# EAGLE board InkTime_PCB_v2 (EAGLE 9.7.0)
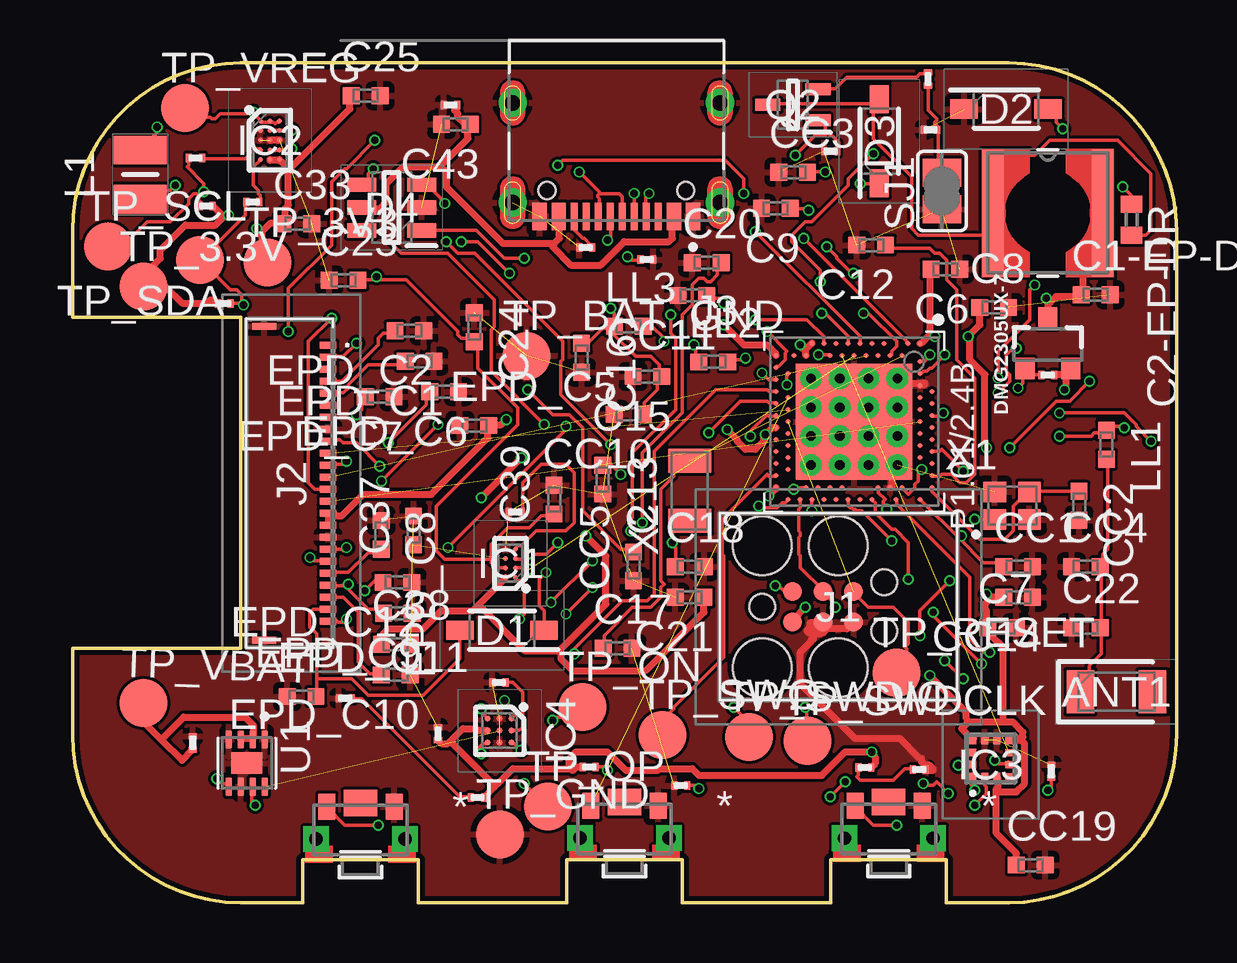
[diagram p0: board, top side]
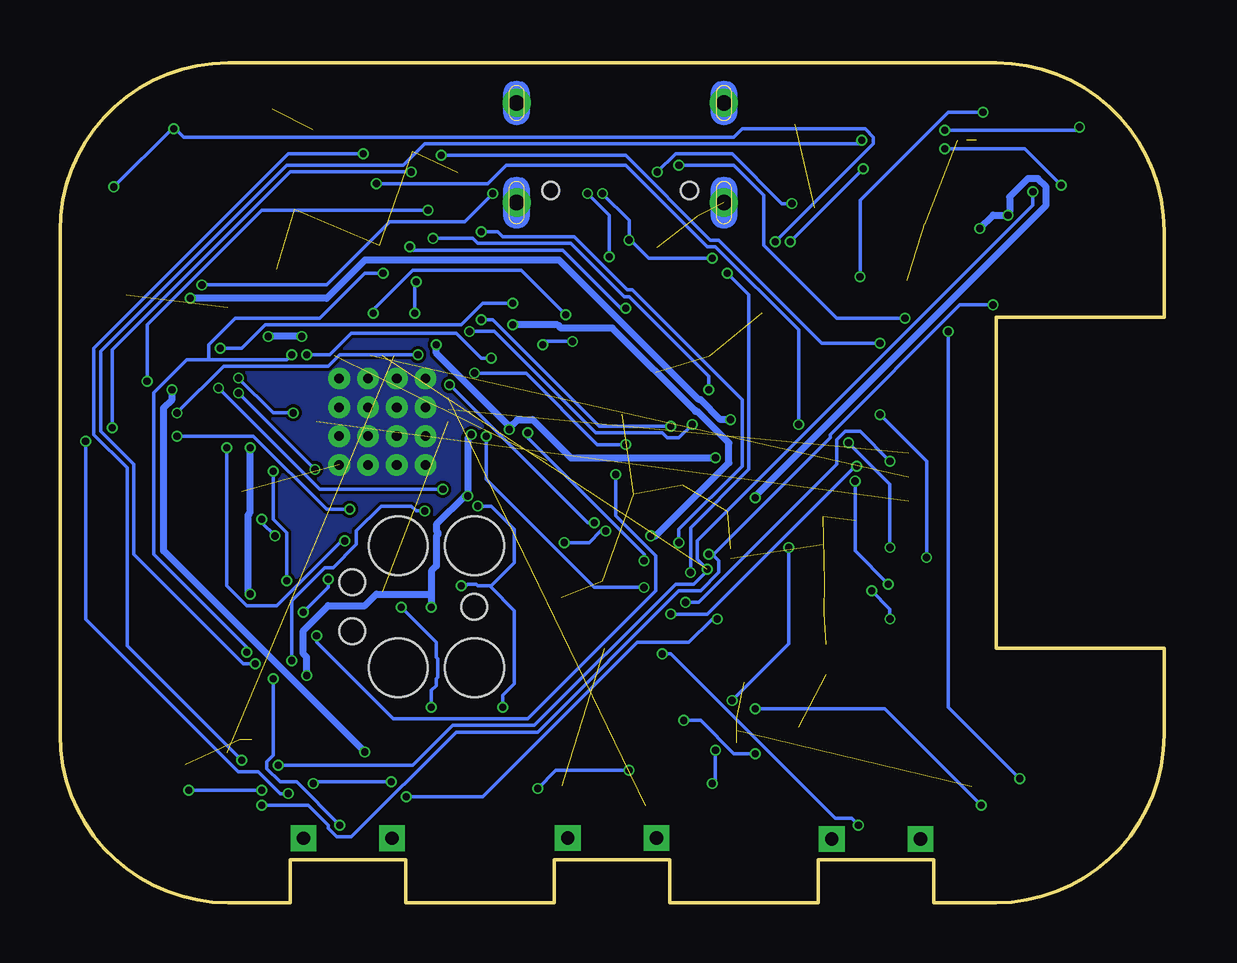
[diagram p1: board, bottom side, seen from below]

Size 46 x 35 mm. Coordinates in mm from the lower left corner, seen from the top.
Outline: 39,0 36.4,0 36.4,1.8 31.6,1.8 31.6,0 25.4,0 25.4,1.8 20.6,1.8 20.6,0 14.4,0 14.4,1.8 9.6,1.8 9.6,0 7,0 arc-90 0,7 0,10.6 7,10.6 7,24.4 0,24.4 0,28 arc-90 7,35 39,35 arc-90 46,28 46,7 arc-90 39,0
Copper layers (1*16): Top 0.035mm / dielectric 1.6mm / Bottom 0.035mm
Design rules "jlcpcb-2layerss.edru": minimum track width 0.15mm, minimum drill 0.3mm, track to track 5mil, track to pad 5mil, pad to pad 5mil, via to via 5mil, smd to smd 5mil, copper to edge 0.2mm, drill to drill 6mil, minimum pad ring 10mil, minimum via ring 3mil, stop-mask expansion 4mil, vias tented up to drill 0mil, thermal gap 10mil
Net classes: 0 default: width 0.15 mm; 1 Power: width 0.3 mm

## Footprints (pad centres in the part's own frame; a part is rotated, then mirrored left to right if it is on the bottom)
2450AT18B100E_ANTC3216X140N = smd 1.15 x 1.8: 1 -1.5,0; 2 1.5,0
NORDIC_NRF_3_RESC0402_M = smd 0.7 x 0.7: 1 -0.6,0; 2 0.6,0
GRM011R60J152KE01L_1_0201 = smd 0.35 x 0.25: 1 0,0.275; 2 0,-0.275
ESP32_C6_LIBRARY_1_ESP32_WROVER_EAGLE-LTSPICE_C0402 = smd 0.7 x 0.9: 1 -0.65,0; 2 0.65,0
ESP32_C6_LIBRARY_5_SOD3716X135N = smd 1.15 x 0.8: 1 -1.75,0; 2 1.75,0
ESP32_C6_LIBRARY_3_SOT95P280X145-6N = smd 1.2 x 0.6: 1 -1.25,0.95; 2 -1.25,0; 3 -1.25,-0.95; 4 1.25,-0.95; 5 1.25,0; 6 1.25,0.95
ESP32_C6_LIBRARY_4_ESP32_C6_LIBRARY_4_ESP32_C6_LIBRARY_4_ESP32_C6_LIBRARY_4_ESP32_WROVER_SPARKFUN-DISCRETESEMI_SOT23-3 = smd 0.8 x 0.9: 1 -0.95,-1; 2 0.95,-1; 3 0,1.1
BQ25180YBGR_BGA8C40P2X4_100X155X50 = smd 0.2 x 0.2: A1 -0.2,0.6; A2 0.2,0.6; B1 -0.2,0.2; B2 0.2,0.2; C1 -0.2,-0.2; C2 0.2,-0.2; D1 -0.2,-0.6; D2 0.2,-0.6
RT6160AWSC_BGA15C40P3X5_140X230X60 = smd 0.216 x 0.216: A1 -0.4,0.8; A2 0,0.8; A3 0.4,0.8; B1 -0.4,0.4; B2 0,0.4; B3 0.4,0.4; C1 -0.4,0; C2 0,0; C3 0.4,0; D1 -0.4,-0.4; D2 0,-0.4; D3 0.4,-0.4; E1 -0.4,-0.8; E2 0,-0.8; E3 0.4,-0.8
BMA423_BMA423 = smd 0.3 x 0.35: 1 -0.75,-0.775; 2 -0.25,-0.775; 3 0.25,-0.775; 4 0.75,-0.775; 7 0.75,0.775; 8 0.25,0.775; 9 -0.25,0.775; 10 -0.75,0.775 | smd 0.35 x 0.3: 5 0.775,-0.25; 6 0.775,0.25; 11 -0.775,0.25; 12 -0.775,-0.25
DRV2605YZFR_BGA9C50P3X3_144X144X62 = smd 0.25 x 0.25: A1 -0.5,0.5; A2 0,0.5; A3 0.5,0.5; B1 -0.5,0; B2 0,0; B3 0.5,0; C1 -0.5,-0.5; C2 0,-0.5; C3 0.5,-0.5
TC2030-IDC_TC2030IDC = smd 0.783 x 0.783: 1 -0.953,-0.635; 2 -0.953,0.635; 3 0.317,-0.635; 4 0.317,0.635; 5 1.588,-0.635; 6 1.588,0.635 | hole 2.451: -2.223,-2.54; -2.223,2.54; 0.952,-2.54; 0.952,2.54 | hole 1.067: -2.223,0; 2.857,-1.016; 2.857,1.016
503480-2400_5034802400 = smd 0.3 x 0.7: 1 -5.75,1.525; 2 -5.25,1.525; 3 -4.75,1.525; 4 -4.25,1.525; 5 -3.75,1.525; 6 -3.25,1.525; 7 -2.75,1.525; 8 -2.25,1.525; 9 -1.75,1.525; 10 -1.25,1.525; 11 -0.75,1.525; 12 -0.25,1.525; 13 0.25,1.525; 14 0.75,1.525; 15 1.25,1.525; 16 1.75,1.525; 17 2.25,1.525; 18 2.75,1.525; 19 3.25,1.525; 20 3.75,1.525; 21 4.25,1.525; 22 4.75,1.525; 23 5.25,1.525; 24 5.75,1.525 | smd 0.3 x 1: MP1 -6.54,-1.125; MP2 6.54,-1.125
KH-TYPE-C-16P_KINGHELM_KH-TYPE-C-16P = smd 0.6 x 1.15: A1_B12 -3.2,4.725; A4_B9 -2.4,4.725; A9_B4 2.4,4.725; A12_B1 3.2,4.725 | smd 0.3 x 1.15: A5 -1.25,4.725; A6 -0.25,4.725; A7 0.25,4.725; A8 1.25,4.725; B5 1.75,4.725; B6 0.75,4.725; B7 -0.75,4.725; B8 -1.75,4.725 | drill 0.65 pad 1.05: SH1 -4.32,0; SH2 4.32,0; SH3 -4.32,4.15; SH4 4.32,4.15 | hole 0.7: -2.89,3.65; 2.89,3.65
MLP2016SR47MT0S1_INDC2016X100N = smd 1.2 x 2.2: 1 -1.028,0; 2 1.028,0
ESP32_C6_LIBRARY_2_IND_4828-WE-TPC_WRE = smd 0.9 x 5.3: 1 -2.286,0; 2 2.286,0
NORDIC_NRF_2_RESC0402_M = smd 0.7 x 0.7: 1 -0.6,0; 2 0.6,0
NORDIC_NRF_4_AQFN50P700X700X85_HS-74N = smd 4.85 x 4.85: P$74 0,0 | drill 0.4 pad 0.6: P$75 -1.8,1.8; P$76 -0.6,1.8; P$77 0.6,1.8; P$78 1.8,1.8; P$79 -1.8,0.6; P$80 -0.6,0.6; P$81 0.6,0.6; P$82 1.8,0.6; P$83 -1.8,-0.6; P$84 -0.6,-0.6; P$85 0.6,-0.6; P$86 1.8,-0.6; P$87 -1.8,-1.8; P$88 -0.6,-1.8; P$89 0.6,-1.8; P$90 1.8,-1.8 | smd 0.2 x 0.2: P$A8 -1.25,3.25; P$A10 -0.75,3.25; P$A12 -0.25,3.25; P$A14 0.25,3.25; P$A16 0.75,3.25; P$A18 1.25,3.25; P$A20 1.75,3.25; P$A22 2.25,3.25; P$A23 2.75,3.25; P$AA24 3.25,-2.25; P$AB2 -2.75,-2.5; P$AC5 -2,-2.75; P$AC9 -1,-2.75; P$AC11 -0.5,-2.75; P$AC13 0,-2.75; P$AC15 0.5,-2.75; P$AC17 1,-2.75; P$AC19 1.5,-2.75; P$AC21 2,-2.75; P$AC24 3.25,-2.75; P$AD2 -2.75,-3.25; P$AD4 -2.25,-3.25; P$AD6 -1.75,-3.25; P$AD8 -1.25,-3.25; P$AD10 -0.75,-3.25; P$AD12 -0.25,-3.25; P$AD14 0.25,-3.25; P$AD16 0.75,-3.25; P$AD18 1.25,-3.25; P$AD20 1.75,-3.25; P$AD22 2.25,-3.25; P$AD23 2.75,-3.25; P$B1 -3.25,2.75; P$B3 -2.5,2.75; P$B5 -2,2.75; P$B7 -1.5,2.75; P$B9 -1,2.75; P$B11 -0.5,2.75; P$B13 0,2.75; P$B15 0.5,2.75; P$B17 1,2.75; P$B19 1.5,2.75; P$B24 3.25,2.75; P$C1 -3.25,2.25; P$D2 -2.75,2; P$D23 2.75,2; P$E24 3.25,1.75; P$F2 -2.75,1.5; P$F23 2.75,1.5; P$G1 -3.25,1.25; P$H2 -2.75,1; P$H23 2.75,1; P$J1 -3.25,0.75; P$J24 3.25,0.75; P$K2 -2.75,0.5; P$L1 -3.25,0.25; P$L24 3.25,0.25; P$M2 -2.75,0; P$N1 -3.25,-0.25; P$N24 3.25,-0.25; P$P2 -2.75,-0.5; P$P23 2.75,-0.5; P$R1 -3.25,-0.75; P$R24 3.25,-0.75; P$T2 -2.75,-1; P$T23 2.75,-1; P$U1 -3.25,-1.25; P$U24 3.25,-1.25; P$V23 2.75,-1.5; P$W1 -3.25,-1.75; P$W24 3.25,-1.75; P$Y2 -2.75,-2; P$Y23 2.75,-2
ESP32_C6_LIBRARY_6_SOT65P210X110-3N = smd 1.05 x 0.5: 1 -1.05,0.65; 2 -1.05,-0.65; 3 1.05,0
CPF0201D7K68C1_0201 = smd 0.35 x 0.25: 1 0,0.275; 2 0,-0.275
ESP32_C6_LIBRARY_7_JUMPER_SJ = smd 1.168 x 1.6: 1 -0.762,0; 2 0.762,0
2025-10-22_07-23-44_LIBRARY_SW_EVP-AKE31A_PAN = smd 0.711 x 1.092: 1 -1.4,-0.972; 2 1.4,-0.972 | drill 0.559 pad 0.914 square: 3 -1.848,0.381; 4 1.848,0.381 | smd 1.397 x 1.092: 5 0,-1.124
HECTOR_WATCH_1_TP20R = smd 2 x 2: TP 0,0
ESP32_C6_LIBRARY_SON50P200X200X80-9N = smd 0.76 x 0.27: 1 -0.985,0.75; 2 -0.985,0.25; 3 -0.985,-0.25; 4 -0.985,-0.75; 5 0.985,-0.75; 6 0.985,-0.25; 7 0.985,0.25; 8 0.985,0.75 | smd 0.9 x 1.3: 9 0,0
NORDIC_NRF_BT-XTAL_2016_N = smd 0.95 x 0.85: 1 -0.725,-0.575; 2 0.725,-0.575; 3 0.725,0.575; 4 -0.725,0.575
NORDIC_NRF_1_XTAL_3215_N = smd 1 x 1.8: 1 -1.25,0; 2 1.25,0

## Placement (x,y rotation side)
ANT1  2450AT18B100E_2450AT18B100E  [2450AT18B100E_ANTC3216X140N]  43.5,8.79 0 top
C1-EP-DR  10uF  [NORDIC_NRF_3_RESC0402_M]  42.63,25.34 0 top
C2  GRM011R60J152KE01L_1_GRM011R60J152KE01L  [GRM011R60J152KE01L_1_0201]  5.01,6.66 0 top
C2-EP-DR  4.7uF/25V  [ESP32_C6_LIBRARY_1_ESP32_WROVER_EAGLE-LTSPICE_C0402]  44.13,28.46 270 top
C3  1uF  [GRM011R60J152KE01L_1_0201]  17.77,9.18 90 top
C4  0.1uF  [GRM011R60J152KE01L_1_0201]  15.23,7.04 0 top
C5  GRM011R60J152KE01L_1_GRM011R60J152KE01L  [GRM011R60J152KE01L_1_0201]  11.37,8.52 90 top
C6  4.7uF  [NORDIC_NRF_3_RESC0402_M]  36.37,26.4 180 top
C7  100nF  [NORDIC_NRF_3_RESC0402_M]  38.73,11.47 0 top
C8  100nF  [NORDIC_NRF_3_RESC0402_M]  38.4,24.81 0 top
C9  820pF  [NORDIC_NRF_3_RESC0402_M]  29.31,28.94 180 top
C10  GRM011R60J152KE01L_1_GRM011R60J152KE01L  [GRM011R60J152KE01L_1_0201]  35.28,5.55 270 top
C11  GRM011R60J152KE01L_1_GRM011R60J152KE01L  [GRM011R60J152KE01L_1_0201]  25.34,4.89 90 top
C12  100pF  [NORDIC_NRF_3_RESC0402_M]  33.28,27.41 180 top
C13  N.C  [NORDIC_NRF_3_RESC0402_M]  22.09,17.63 270 top
C15  1uF  [NORDIC_NRF_3_RESC0402_M]  23.95,21.93 180 top
C16  47nF  [NORDIC_NRF_3_RESC0402_M]  21.21,22.71 270 top
C17  12pF  [NORDIC_NRF_3_RESC0402_M]  22.71,10.61 0 top
C18  12pF  [NORDIC_NRF_3_RESC0402_M]  25.72,14.01 0 top
C20  4.7uF  [NORDIC_NRF_3_RESC0402_M]  26.43,26.68 0 top
C21  4.7uF  [NORDIC_NRF_3_RESC0402_M]  25.71,12.74 180 top
C22  N.C  [NORDIC_NRF_3_RESC0402_M]  42.23,11.47 0 top
C23  0.1uF  [NORDIC_NRF_3_RESC0402_M]  11.3,25.95 0 top
C24  10uF  [NORDIC_NRF_3_RESC0402_M]  16.74,23.98 270 top
C25  22uF  [NORDIC_NRF_3_RESC0402_M]  12.22,33.63 0 top
C33  22uF  [NORDIC_NRF_3_RESC0402_M]  9.36,28.3 0 top
C37  1uF  [NORDIC_NRF_3_RESC0402_M]  14.21,15.52 90 top
C38  1uF  [NORDIC_NRF_3_RESC0402_M]  13.48,10.78 0 top
C39  10uF  [NORDIC_NRF_3_RESC0402_M]  20.06,16.8 90 top
C42  GRM011R60J152KE01L_1_GRM011R60J152KE01L  [GRM011R60J152KE01L_1_0201]  15.75,33.25 90 top
C43  4.7uF  [NORDIC_NRF_3_RESC0402_M]  15.97,32.44 180 top
CC1  12pF  [NORDIC_NRF_3_RESC0402_M]  39.4,14.01 0 top
CC2  12pF  [NORDIC_NRF_3_RESC0402_M]  41.94,16.55 270 top
CC3  1pF  [NORDIC_NRF_3_RESC0402_M]  30.03,30.45 0 top
CC4  1pF  [NORDIC_NRF_3_RESC0402_M]  42.23,14.01 0 top
CC5  100nF  [NORDIC_NRF_3_RESC0402_M]  23.38,14.02 90 top
CC10  N.C  [NORDIC_NRF_3_RESC0402_M]  23.18,20.36 180 top
CC11  100pF  [NORDIC_NRF_3_RESC0402_M]  25.83,25.31 180 top
CC14  4.7uF  [NORDIC_NRF_3_RESC0402_M]  39.4,12.74 180 top
CC19  100nF  [NORDIC_NRF_3_RESC0402_M]  39.93,1.57 0 top
D1  ESP32_C6_LIBRARY_5_MBR0530  [ESP32_C6_LIBRARY_5_SOD3716X135N]  17.89,11.35 180 top
D2  ESP32_C6_LIBRARY_5_MBR0530  [ESP32_C6_LIBRARY_5_SOD3716X135N]  38.9,33.08 0 top
D3  ESP32_C6_LIBRARY_5_MBR0530  [ESP32_C6_LIBRARY_5_SOD3716X135N]  33.62,31.73 90 top
D4  ESP32_C6_LIBRARY_3_USBLC6-2SC6Y  [ESP32_C6_LIBRARY_3_SOT95P280X145-6N]  13.29,28.97 180 top
DMG2305UX-7  20V/4.2A/52mΩ/1.4W  [ESP32_C6_LIBRARY_4_ESP32_C6_LIBRARY_4_ESP32_C6_LIBRARY_4_ESP32_C6_LIBRARY_4_ESP32_WROVER_SPARKFUN-DISCRETESEMI_SOT23-3]  40.64,23.27 0 top
EPD_C1  1uF/50V  [NORDIC_NRF_3_RESC0402_M]  14.46,22.57 180 top
EPD_C2  1uF/50V  [NORDIC_NRF_3_RESC0402_M]  14.04,23.84 180 top
EPD_C5  0.1uF/50V  [NORDIC_NRF_3_RESC0402_M]  16.74,19.89 0 top
EPD_C6  1uF/50V  [NORDIC_NRF_3_RESC0402_M]  15.48,21.3 180 top
EPD_C7  1uF/50V  [NORDIC_NRF_3_RESC0402_M]  12.79,21.09 180 top
EPD_C8  1uF/50V  [NORDIC_NRF_3_RESC0402_M]  12.86,15.33 270 top
EPD_C9  1uF/50V  [NORDIC_NRF_3_RESC0402_M]  13.55,12.07 180 top
EPD_C10  1uF/50V  [NORDIC_NRF_3_RESC0402_M]  13.47,9.49 180 top
EPD_C11  1uF/50V  [NORDIC_NRF_3_RESC0402_M]  9.54,8.6 0 top
EPD_C12  1uF/50V  [NORDIC_NRF_3_RESC0402_M]  13.54,13.35 180 top
IC1  BQ25180YBGR_BQ25180YBGR  [BQ25180YBGR_BGA8C40P2X4_100X155X50]  18.25,14.15 180 top
IC2  RT6160AWSC_RT6160AWSC  [RT6160AWSC_BGA15C40P3X5_140X230X60]  8.22,31.78 0 top
IC3  BMA423_BMA423  [BMA423_BMA423]  38.26,6.01 359.8 top
IC4  DRV2605YZFR_DRV2605YZFR  [DRV2605YZFR_BGA9C50P3X3_144X144X62]  17.8,7.17 270 top
J1  TC2030-IDC_TC2030-IDC  [TC2030-IDC_TC2030IDC]  30.96,12.34 0 top
J2  503480-2400_503480-2400  [503480-2400_5034802400]  9.12,17.49 270 top
J3  KH-TYPE-C-16P_KH-TYPE-C-16P  [KH-TYPE-C-16P_KINGHELM_KH-TYPE-C-16P]  22.66,33.33 180 top
L1  MLP2016SR47MT0S1_FTC252012SR47MBCA  [MLP2016SR47MT0S1_INDC2016X100N]  2.82,30.34 270 top
L5  ESP32_C6_LIBRARY_2_744043680IND_4828-WE-TPC_WRE  [ESP32_C6_LIBRARY_2_IND_4828-WE-TPC_WRE]  40.64,28.75 0 top
LL1  3.9nH  [NORDIC_NRF_2_RESC0402_M]  43.08,19.09 270 top
LL2  10uH  [NORDIC_NRF_2_RESC0402_M]  26.7,22.54 0 top
LL3  15uH  [NORDIC_NRF_2_RESC0402_M]  23.18,24.02 0 top
P1.01/2.4B  NORDIC_NRF_4_NRF52840_QF  [NORDIC_NRF_4_AQFN50P700X700X85_HS-74N]  32.57,20.05 270 top
Q2  ESP32_C6_LIBRARY_6_SI1308EDL-T1-GE3  [ESP32_C6_LIBRARY_6_SOT65P210X110-3N]  30.01,33.25 180 top
R1_EP_DR  CPF0201D7K68C1_CPF0201D7K68C1  [CPF0201D7K68C1_0201]  35.65,34.32 180 top
R2  CPF0201D7K68C1_CPF0201D7K68C1  [CPF0201D7K68C1_0201]  5.12,31.04 90 top
R2_EP_DR  CPF0201D7K68C1_CPF0201D7K68C1  [CPF0201D7K68C1_0201]  31.59,31.32 90 top
R3  CPF0201D7K68C1_CPF0201D7K68C1  [CPF0201D7K68C1_0201]  7.51,29.2 90 top
R4  CPF0201D7K68C1_CPF0201D7K68C1  [CPF0201D7K68C1_0201]  5.58,29.04 90 top
R5  CPF0201D7K68C1_CPF0201D7K68C1  [CPF0201D7K68C1_0201]  6.32,24.97 270 top
R8  CPF0201D7K68C1_CPF0201D7K68C1  [CPF0201D7K68C1_0201]  40.78,5.48 180 top
R9  10K  [CPF0201D7K68C1_0201]  18.45,16.29 90 top
R11  CPF0201D7K68C1_CPF0201D7K68C1  [CPF0201D7K68C1_0201]  16.88,4.38 90 top
R12  CPF0201D7K68C1_CPF0201D7K68C1  [CPF0201D7K68C1_0201]  33.01,5.64 90 top
R13  CPF0201D7K68C1_CPF0201D7K68C1  [CPF0201D7K68C1_0201]  21.53,5.65 270 top
R14  CPF0201D7K68C1_CPF0201D7K68C1  [CPF0201D7K68C1_0201]  23.93,26.8 90 top
R15  CPF0201D7K68C1_CPF0201D7K68C1  [CPF0201D7K68C1_0201]  21.39,27.31 90 top
R_PWR_EPD  CPF0201D7K68C1_CPF0201D7K68C1  [CPF0201D7K68C1_0201]  40.64,22 90 top
R_TYPE_SEL  CPF0201D7K68C1_CPF0201D7K68C1  [CPF0201D7K68C1_0201]  35.75,32.21 90 top
SJ1  0  [ESP32_C6_LIBRARY_7_JUMPER_SJ]  36.22,29.66 90 top
SW1  2025-10-22_07-23-44_LIBRARY_EVP-AKE31ASW_EVP-AKE31A_PAN  [2025-10-22_07-23-44_LIBRARY_SW_EVP-AKE31A_PAN]  12,3.03 180 top
SW2  2025-10-22_07-23-44_LIBRARY_EVP-AKE31ASW_EVP-AKE31A_PAN  [2025-10-22_07-23-44_LIBRARY_SW_EVP-AKE31A_PAN]  23,3.08 180 top
SW3  2025-10-22_07-23-44_LIBRARY_EVP-AKE31ASW_EVP-AKE31A_PAN  [2025-10-22_07-23-44_LIBRARY_SW_EVP-AKE31A_PAN]  34.01,3.07 180 top
TP_3.3V  HECTOR_WATCH_1_TPTP20R  [HECTOR_WATCH_1_TP20R]  2.96,25.68 0 top
TP_3V3  HECTOR_WATCH_1_TPTP20R  [HECTOR_WATCH_1_TP20R]  8.12,26.68 0 top
TP_BAT_GND  HECTOR_WATCH_1_TPTP20R  [HECTOR_WATCH_1_TP20R]  18.92,22.79 0 top
TP_GND  HECTOR_WATCH_1_TPTP20R  [HECTOR_WATCH_1_TP20R]  17.8,2.85 0 top
TP_ON  HECTOR_WATCH_1_TPTP20R  [HECTOR_WATCH_1_TP20R]  21.24,8.17 0 top
TP_OP  HECTOR_WATCH_1_TPTP20R  [HECTOR_WATCH_1_TP20R]  19.81,4.01 0 top
TP_RESET  HECTOR_WATCH_1_TPTP20R  [HECTOR_WATCH_1_TP20R]  34.33,9.59 0 top
TP_SCL  HECTOR_WATCH_1_TPTP20R  [HECTOR_WATCH_1_TP20R]  1.48,27.35 0 top
TP_SDA  HECTOR_WATCH_1_TPTP20R  [HECTOR_WATCH_1_TP20R]  5.31,26.78 180 top
TP_SWDCLK  HECTOR_WATCH_1_TPTP20R  [HECTOR_WATCH_1_TP20R]  30.62,6.75 0 top
TP_SWDIO  HECTOR_WATCH_1_TPTP20R  [HECTOR_WATCH_1_TP20R]  28.19,6.92 0 top
TP_SWO  HECTOR_WATCH_1_TPTP20R  [HECTOR_WATCH_1_TP20R]  24.59,7 0 top
TP_VBAT  HECTOR_WATCH_1_TPTP20R  [HECTOR_WATCH_1_TP20R]  2.96,8.33 358.1 top
TP_VREG  HECTOR_WATCH_1_TPTP20R  [HECTOR_WATCH_1_TP20R]  4.69,33.12 0 top
U1  ESP32_C6_LIBRARY_MAX17048G+T10  [ESP32_C6_LIBRARY_SON50P200X200X80-9N]  7.26,5.82 270 top
X1  32MHz  [NORDIC_NRF_BT-XTAL_2016_N]  39.15,16.55 0 top
X2  32.768KHz  [NORDIC_NRF_1_XTAL_3215_N]  25.72,17.17 90 top

## Library data of the parts
ANT1 = InkTime_v5; ARROW_PART_NUMBER: 2450AT18B100E; ARROW_PRICE-STOCK: https://www.arrow.com/en/products/2450at18b100e/johanson-dielectrics?utm_currency=USD&region=nac; DESCRIPTION: Antennas 2.45GHz ANTENNA; HEIGHT: 1.4mm; MANUFACTURER_NAME: JOHANSON TECHNOLOGY; MANUFACTURER_PART_NUMBER: 2450AT18B100E; MOUSER_PART_NUMBER: 609-2450AT18B100E; MOUSER_PRICE-STOCK: https://www.mouser.co.uk/ProductDetail/Johanson-Technology/2450AT18B100E?qs=yCnrNFeXz%252Bh5MFsFIXGZGA%3D%3D
C1-EP-DR C2-C13 C15-C18 C20-C25 C33 C37-C39 C42 C43 CC1-CC5 CC10 CC11 CC14 CC19 EPD_C1 EPD_C2 EPD_C5-EPD_C12 LL1-LL3 P1.01/2.4B R1_EP_DR R2 R2_EP_DR R3-R5 R8 R9 R11-R15 R_PWR_EPD R_TYPE_SEL SJ1 TP_3.3V TP_3V3 TP_BAT_GND TP_GND TP_ON TP_OP TP_RESET TP_SCL TP_SDA TP_SWDCLK TP_SWDIO TP_SWO TP_VBAT TP_VREG X1 X2 = InkTime_v5
C2-EP-DR = InkTime_v5; SPICEMODEL: NONE; SPICEPREFIX: C
D1-D3 = InkTime_v5; AVAILABILITY: In Stock; CHECK_PRICES: https://www.snapeda.com/parts/MBR0530/Onsemi/view-part/?ref=eda; DESCRIPTION: Diode Schottky 30 V 500mA Surface Mount SOD-123; MF: ON Semiconductor; MP: MBR0530; PACKAGE: SOD-123-2 ON Semiconductor; PRICE: None; PURCHASE-URL: https://www.snapeda.com/api/url_track_click_mouser/?unipart_id=179458&manufacturer=ON Semiconductor&part_name=MBR0530&search_term=None; SNAPEDA_LINK: https://www.snapeda.com/parts/MBR0530/Onsemi/view-part/?ref=snap
D4 = InkTime_v5; AVAILABILITY: In Stock; CHECK_PRICES: https://www.snapeda.com/parts/USBLC6-2SC6Y/STMicroelectronics/view-part/?ref=eda; DESCRIPTION: 17V Clamp 5A (8/20µs) Ipp Tvs Diode Surface Mount SOT-23-6; MF: STMicroelectronics; MP: USBLC6-2SC6Y; PACKAGE: SOT-23-6 STMicroelectronics; PRICE: None; SNAPEDA_LINK: https://www.snapeda.com/parts/USBLC6-2SC6Y/STMicroelectronics/view-part/?ref=snap
DMG2305UX-7 = InkTime_v5; PROD_ID: TRAN-14388
IC1 = InkTime_v5; ARROW_PART_NUMBER: BQ25180YBGR; ARROW_PRICE-STOCK: https://www.arrow.com/en/products/bq25180ybgr/texas-instruments?utm_currency=USD&region=nac; DESCRIPTION: Charger IC Lithium Ion/Polymer, Lithium Iron Phosphate 8-DSBGA (1.6x1.1); HEIGHT: 0.5mm; MANUFACTURER_NAME: Texas Instruments; MANUFACTURER_PART_NUMBER: BQ25180YBGR; MOUSER_PART_NUMBER: 595-BQ25180YBGR; MOUSER_PRICE-STOCK: https://www.mouser.co.uk/ProductDetail/Texas-Instruments/BQ25180YBGR?qs=doiCPypUmgEWjAK%252BJAX6Tw%3D%3D
IC2 = InkTime_v5; DESCRIPTION: Buck-Boost Regulator Positive Output Step-Up/Step-Down I2C DC-DC Controller IC 15-WL-CSP (BSC) (1.4x2.3); HEIGHT: 0.6mm; MANUFACTURER_NAME: RICHTEK; MANUFACTURER_PART_NUMBER: RT6160AWSC; MOUSER_PART_NUMBER: 835-RT6160AWSC; MOUSER_PRICE-STOCK: https://www.mouser.co.uk/ProductDetail/Richtek/RT6160AWSC?qs=amGC7iS6iy%2FLd9PSoixZXQ%3D%3D
IC3 = InkTime_v5; ARROW_PART_NUMBER: BMA423; ARROW_PRICE-STOCK: https://www.arrow.com/en/products/bma423/bosch; DESCRIPTION: Accelerometers Triaxial low-g 12bit Acceleration Sensor; HEIGHT: 1mm; MANUFACTURER_NAME: BOSCH; MANUFACTURER_PART_NUMBER: BMA423; MOUSER_PART_NUMBER: 262-BMA423; MOUSER_PRICE-STOCK: https://www.mouser.co.uk/ProductDetail/Bosch-Sensortec/BMA423?qs=HXFqYaX1Q2xC%252BSgeGoX3mg%3D%3D
IC4 = InkTime_v5; ARROW_PART_NUMBER: DRV2605YZFR; ARROW_PRICE-STOCK: https://www.arrow.com/en/products/drv2605yzfr/texas-instruments?region=nac; DESCRIPTION: Haptic Driver for ERM/LRA with Built-In Library and Smart Loop Architecture; HEIGHT: 0.625mm; MANUFACTURER_NAME: Texas Instruments; MANUFACTURER_PART_NUMBER: DRV2605YZFR
J1 = InkTime_v5; DESCRIPTION: CABLE ADAPTER 6 POS; HEIGHT: 19mm; MANUFACTURER_NAME: Tag Connect; MANUFACTURER_PART_NUMBER: TC2030-IDC
J2 = InkTime_v5; DESCRIPTION: FFC & FPC Connectors 0.5mm FPC RA SMT Dual Contact 24Ckt; HEIGHT: 1.87mm; MANUFACTURER_NAME: Molex; MANUFACTURER_PART_NUMBER: 503480-2400; MOUSER_PART_NUMBER: 538-503480-2400; MOUSER_PRICE-STOCK: https://www.mouser.co.uk/ProductDetail/Molex/503480-2400?qs=OAhjpuo3Vu7efIoxFh9AOw%3D%3D
J3 = InkTime_v5; AVAILABILITY: Not in stock; CHECK_PRICES: https://www.snapeda.com/parts/KH-TYPE-C-16P/Kinghelm/view-part/?ref=eda; MF: kinghelm; MP: KH-TYPE-C-16P; PACKAGE: None; PRICE: None; SNAPEDA_LINK: https://www.snapeda.com/parts/KH-TYPE-C-16P/Kinghelm/view-part/?ref=snap
L1 = InkTime_v5; DESCRIPTION: SMD / SMT Inductors (Coils), L=0.47?H, L x W x T :; HEIGHT: 1mm; JLCPCB: https://jlcpcb.com/partdetail/6763488-FTC252012SR47MBCA/C5832368; MANUFACTURER_NAME: TDK; MANUFACTURER_PART_NUMBER: FTC252012SR47MBCA
L5 = InkTime_v5; COPYRIGHT: Copyright (C) 2024 Ultra Librarian. All rights reserved.; MANUFACTURER_PART_NUMBER: 744043680; MFR_NAME: Wurth Electronics
Q2 = InkTime_v5; AVAILABILITY: In Stock; CHECK_PRICES: https://www.snapeda.com/parts/SI1308EDL-T1-GE3/Vishay+Siliconix/view-part/?ref=eda; DESCRIPTION: Si1308EDL-T1-GE3 N-channel MOSFET Transistor, 1.5 A, 30 V, 3-Pin SC-70 | Siliconix / Vishay SI1308EDL-T1-GE3; MF: Vishay Siliconix; MP: SI1308EDL-T1-GE3; PACKAGE: SOT-323 Vishay Semiconductor; PRICE: None; PURCHASE-URL: https://www.snapeda.com/api/url_track_click_mouser/?unipart_id=274603&manufacturer=Vishay Siliconix&part_name=SI1308EDL-T1-GE3&search_term=None; SNAPEDA_LINK: https://www.snapeda.com/parts/SI1308EDL-T1-GE3/Vishay+Siliconix/view-part/?ref=snap
SW1-SW3 = InkTime_v5; COPYRIGHT: Copyright (C) 2025 Ultra Librarian. All rights reserved.; DIGI-KEY_PART_NUMBER_1: P123437TR-ND; DIGI-KEY_PART_NUMBER_2: P123437CT-ND; DIGI-KEY_PART_NUMBER_3: P123437DKR-ND; MANUFACTURER_NAME: Panasonic; MANUFACTURER_PART_NUMBER: EVP-AKE31A
U1 = InkTime_v5; AVAILABILITY: In Stock; CHECK_PRICES: https://www.snapeda.com/parts/MAX17048G+T10/Analog+Devices/view-part/?ref=eda; DESCRIPTION: 3µA 1-Cell/2-Cell Fuel Gauge with ModelGauge; MF: Analog Devices; MP: MAX17048G+T10; PACKAGE: TDFN-8 Maxim; PRICE: None; PURCHASE-URL: https://www.snapeda.com/api/url_track_click_mouser/?unipart_id=329239&manufacturer=Analog Devices&part_name=MAX17048G+T10&search_term=None; SNAPEDA_LINK: https://www.snapeda.com/parts/MAX17048G+T10/Analog+Devices/view-part/?ref=snap

## Nets
3V3/1.7D: C4.2 DMG2305UX-7.2 IC4.C2 R11.2 R12.2 R13.2 R_PWR_EPD.2
3V3/2.4A: C6.2 C7.1 C8.1 C25.1 C33.1 CC14.2 CC19.1 IC2.E2 IC2.E3 IC3.3 IC3.7 IC3.10 J1.1 P1.01/2.4B.P$AD14 P1.01/2.4B.P$AD23 P1.01/2.4B.P$B1 P1.01/2.4B.P$W1 P1.01/2.4B.P$Y2 R4.2 R5.2 TP_3.3V.TP TP_3V3.TP
ALERT: P1.01/2.4B.P$J24 U1.5
D+: D4.4 P1.01/2.4B.P$AD6
D-: D4.6 P1.01/2.4B.P$AD4
DN: D4.1 J3.A7 J3.B7
DP: D4.3 J3.A6 J3.B6
EPD_3V3: C1-EP-DR.1 DMG2305UX-7.3 EPD_C5.2 J2.15 J2.16 L5.2
EPD_BUSY: J2.9 P1.01/2.4B.P$AD12
EPD_CS: J2.12 P1.01/2.4B.P$K2
EPD_DC: J2.11 P1.01/2.4B.P$AD10
EPD_RST: J2.10 P1.01/2.4B.P$AC11
GDR: J2.2 Q2.1 R2_EP_DR.2
GND: C1-EP-DR.2 C2.1 C3.1 C4.1 C5.1 C6.1 C7.2 C8.2 C9.2 C10.1 C11.1 C12.2 C13.2 C15.2 C16.2 C17.2 C18.2 C20.1 C21.2 C22.1 C23.1 C24.1 C25.2 C33.2 C37.2 C38.2 C39.2 C42.1 C43.2 CC1.2 CC2.2 CC3.1 CC4.1 CC5.1 CC10.2 CC11.2 CC14.1 CC19.2 D2.1 D4.2 EPD_C1.1 EPD_C2.1 EPD_C5.1 EPD_C6.1 EPD_C7.1 EPD_C8.1 EPD_C9.1 EPD_C10.1 EPD_C11.1 EPD_C12.1 IC1.D2 IC2.B1 IC2.C1 IC2.C2 IC2.C3 IC3.8 IC3.9 IC4.B1 IC4.B3 J1.3 J1.5 J2.8 J2.17 J2.MP1 J2.MP2 J3.A1_B12 J3.A12_B1 J3.SH1 J3.SH2 J3.SH3 J3.SH4 P1.01/2.4B.P$74 P1.01/2.4B.P$75 P1.01/2.4B.P$76 P1.01/2.4B.P$77 P1.01/2.4B.P$78 P1.01/2.4B.P$79 P1.01/2.4B.P$80 P1.01/2.4B.P$81 P1.01/2.4B.P$82 P1.01/2.4B.P$83 P1.01/2.4B.P$84 P1.01/2.4B.P$85 P1.01/2.4B.P$86 P1.01/2.4B.P$87 P1.01/2.4B.P$88 P1.01/2.4B.P$89 P1.01/2.4B.P$90 P1.01/2.4B.P$B7 P1.01/2.4B.P$F23 R2_EP_DR.1 R8.2 R9.1 R14.2 R15.1 R_TYPE_SEL.1 SJ1.1 SW1.1 SW2.1 SW3.1 TP_BAT_GND.TP TP_GND.TP U1.1 U1.4 U1.6 U1.9 X1.2 X1.4
HAPTIC_EN: IC4.A1 P1.01/2.4B.P$U1
IMU_INT1: IC3.5 P1.01/2.4B.P$N1
IMU_INT2: IC3.6 P1.01/2.4B.P$P2
LX1: IC2.B2 IC2.B3 L1.1
LX2: IC2.D2 IC2.D3 L1.2
MOSI: J2.14 P1.01/2.4B.P$B13
N$1: IC1.D1 R9.2
N$2: C9.1 P1.01/2.4B.P$N24
N$3: CC3.2 LL1.1 P1.01/2.4B.P$H23
N$4: IC2.D1 R2.2
N$5: IC2.E1 R3.2
N$6: C20.2 P1.01/2.4B.P$AC5
N$7: ANT1.1 C22.2 CC4.2 LL1.2
N$8: CC1.1 P1.01/2.4B.P$B24 X1.1
N$9: CC2.1 P1.01/2.4B.P$A23 X1.3
N$10: CC11.1 P1.01/2.4B.P$D23
N$11: C18.1 P1.01/2.4B.P$F2 X2.1
N$12: C12.1 P1.01/2.4B.P$A22
N$13: C13.1 P1.01/2.4B.P$A18
N$14: LL2.1 LL3.2
N$15: LL2.2 P1.01/2.4B.P$B3
N$17: C15.1 C16.1 CC10.1 LL3.1 P1.01/2.4B.P$B5 P1.01/2.4B.P$E24
N$18: C17.1 P1.01/2.4B.P$D2 X2.2
N$19: IC3.1 R8.1
N$20: CC5.2 P1.01/2.4B.P$C1
N$21: C2-EP-DR.1 D1.1 D2.2
N$22: Q2.2 R1_EP_DR.2
N$23: R1_EP_DR.1 R_TYPE_SEL.2 SJ1.2
N$24: C2-EP-DR.2 D3.2 L5.1 Q2.3
N$25: EPD_C2.2 J2.4
N$26: EPD_C1.2 J2.5
N$27: J3.B5 R15.2
N$28: EPD_C7.2 J2.19
N$29: C5.2 R11.1
N$30: EPD_C12.2 J2.24
N$31: EPD_C6.2 J2.18
N$32: EPD_C8.2 J2.20
N$33: C10.2 R12.1
N$34: EPD_C10.2 J2.22
N$35: C11.2 R13.1
N$36: J3.A5 R14.1
N$37: C3.2 IC4.A2
OUT+: IC4.A3 TP_OP.TP
OUT-: IC4.C3 TP_ON.TP
P0.04: P1.01/2.4B.P$J1
P0.09: P1.01/2.4B.P$L24
P0.13: P1.01/2.4B.P$AD8 SW1.2
P0.14: P1.01/2.4B.P$AC9 SW2.2
P0.19: P1.01/2.4B.P$AC15
P0.20: P1.01/2.4B.P$AD16
P0.21: P1.01/2.4B.P$AC17
P0.22: P1.01/2.4B.P$AD18
P0.23: P1.01/2.4B.P$AC19
P0.24: P1.01/2.4B.P$AD20
P0.25: P1.01/2.4B.P$AC21
P0.26: P1.01/2.4B.P$G1
P0.27: P1.01/2.4B.P$H2
P0.28: P1.01/2.4B.P$B11
P0.29: P1.01/2.4B.P$A10
P0.30: P1.01/2.4B.P$B9
P0.31: P1.01/2.4B.P$A8
P1.01: DMG2305UX-7.1 P1.01/2.4B.P$Y23 R_PWR_EPD.1
P1.02: P1.01/2.4B.P$W24 SW3.2
P1.03: P1.01/2.4B.P$V23
P1.04: P1.01/2.4B.P$U24
P1.05: P1.01/2.4B.P$T23
P1.06: P1.01/2.4B.P$R24
P1.07: P1.01/2.4B.P$P23
P1.09: P1.01/2.4B.P$R1
P1.10: P1.01/2.4B.P$A20
P1.11: P1.01/2.4B.P$B19
P1.12: P1.01/2.4B.P$B17
P1.13: P1.01/2.4B.P$A16
P1.14: P1.01/2.4B.P$B15
P1.15: P1.01/2.4B.P$A14
PMIC_INT: IC1.A1 P1.01/2.4B.P$T2
PREVGH: D3.1 EPD_C9.2 J2.21
PREVGL: D1.2 EPD_C11.2 J2.23
RESE: J2.3
RESET: J1.6 P1.01/2.4B.P$AC13 TP_RESET.TP
SCK: J2.13 P1.01/2.4B.P$A12
SCL/1.4C: IC4.C1 U1.7
SCL/2.4C: IC1.B1 IC3.12 P1.01/2.4B.P$M2 R2.1 R4.1 TP_SCL.TP
SDA/1.4C: IC4.B2 U1.8
SDA/2.4C: IC1.C1 IC3.2 P1.01/2.4B.P$L1 R3.1 R5.1 TP_SDA.TP
SWDCLK: J1.4 P1.01/2.4B.P$AA24 TP_SWDCLK.TP
SWDIO: J1.2 P1.01/2.4B.P$AC24 TP_SWDIO.TP
SWO: P1.01/2.4B.P$AD22 TP_SWO.TP
VBAT/1.2A: C2.2 TP_VBAT.TP U1.2 U1.3
VBAT/2.5C: C37.1 IC1.C2
VBUS/1.5D: C42.2 C43.1 D4.5 J3.A4_B9 J3.A9_B4
VBUS/2.6D: C21.1 C38.1 IC1.A2 P1.01/2.4B.P$AD2
VREG: C23.2 C24.2 C39.1 IC1.B2 IC2.A1 IC2.A2 IC2.A3 TP_VREG.TP

## Tracks (layer width: path | path; a pad name or v marks a point on that pad's centre or on a via)
3V3/1.7D  (via drill 0.3)
  Top 0.3: R_PWR_EPD.2 41.33,22 41.54,22.21 DMG2305UX-7.2 41.4,21.87 41.4,21.45 v41.33,21.38 | 15.75,6.74 15.64,6.63 15.36,6.63 15.3,6.7 C4.2 | 15.75,6.74 16.26,7.25 16.82,7.25 16.89,7.19 17.23,7.19 IC4.C2 | 17.58,4.9 17.58,4.83 17.16,4.42 R11.2 | 15.75,6.74 17.58,4.9 | 20.77,5.59 20.84,5.52 20.97,5.66 R13.2 | 20.77,5.59 18.34,5.59 17.72,4.97 17.58,4.9 | 33.27,6.25 33.23,6.29 32.19,6.29 31.22,5.32 26.1,5.32 25.82,5.59 24.44,5.59 24.37,5.52 23.05,5.52 22.29,6.29 20.97,6.29 20.7,6.01 20.7,5.73 20.77,5.59 | 33.27,6.25 33.44,6.08 33.44,5.8 33.3,5.66 R12.2 | v33.3,6.29 33.27,6.25
  Bottom 0.3: v41.33,21.38 41.33,20.97 41.68,20.62 41.68,14.66 v33.3,6.29
3V3/2.4A  (via drill 0.3)
  Top 0.3: R5.2 6.02,24.98 5.88,25.12 5.74,25.12 5.6,24.98 4.56,24.98 3.87,25.68 2.97,25.68 TP_3.3V.TP 3.31,25.81 3.31,26.51 3.66,26.85 3.66,27.2 4.7,28.24 5.95,28.24 6.29,28.58 | 6.29,28.58 5.88,29 R4.2 | 8.58,30.94 8.23,30.94 IC2.E2 | 8.58,30.94 IC2.E3 | 8.99,30.59 8.72,30.87 8.58,30.94 | 8.99,30.59 8.99,29.07 8.85,28.93 8.85,28.38 8.79,28.31 C33.1 8.65,28.31 8.23,28.31 7.89,27.96 | C25.1 11.56,33.57 11.56,33.08 9.13,30.66 8.99,30.59 | 7.89,27.96 7.89,27.68 8.09,27.48 8.09,26.71 TP_3V3.TP | v6.5,28.65 6.43,28.65 6.29,28.58 | v7.68,28.1 7.75,28.03 7.89,27.96 | 30.53,23.04 30.53,22.84 P1.01/2.4B.P$Y2 | 30.53,23.04 30.81,23.32 P1.01/2.4B.P$W1 | v29.01,16.95 29.28,17.23 P1.01/2.4B.P$AD23 | P1.01/2.4B.P$AD14 29.28,19.79 29.15,19.79 v28.87,19.51 28.8,19.37 28.8,19.24 28.45,18.89 28.04,18.89 27.69,19.24 27.69,19.3 v27.28,19.72 | v30.32,23.25 30.39,23.18 30.39,23.11 30.53,23.04 | v30.53,12.31 30.05,11.83 30.05,11.76 J1.1 | 35.72,23.67 35.38,23.32 P1.01/2.4B.P$B1 | 35.72,23.67 35.72,26.37 C6.2 | v35.93,23.6 35.86,23.6 35.72,23.67 | C8.1 37.8,24.77 37.8,24.08 v37.32,23.6 37.39,23.46 37.39,22.63 38.01,22 38.01,19.03 v38.08,18.96 | 38.25,12.69 38.29,12.73 38.77,12.73 CC14.2 | 38.25,12.69 38.01,12.45 38.01,12.24 38.08,12.17 38.08,11.48 C7.1 38.15,11.34 38.29,11.2 38.29,11.13 38.77,10.65 38.77,7.53 | 38.49,4.62 38.49,2.89 39.32,2.06 CC19.1 | 38.49,4.62 38.49,4.76 38.56,4.83 38.56,5.18 IC3.3 | 39.53,6.77 39.46,6.77 39.39,6.84 39.19,6.84 39.12,6.77 39.05,6.77 IC3.7 | 39.53,6.77 39.67,6.63 39.67,4.97 39.32,4.62 38.49,4.62 | 37.32,7.53 37.04,7.25 37.45,6.84 IC3.10 | 38.77,7.53 39.19,7.53 39.6,7.12 39.6,6.91 39.53,6.77
  Top 0.3: 38.77,7.53 37.32,7.53 | v38.08,12.86 38.25,12.69 | v35.72,9.47 37.25,7.95 37.25,7.67 37.32,7.53 | v18.69,18.54 v17.03,16.88
  Bottom 0.3: v7.68,28.1 7.12,28.65 v6.5,28.65 6.43,28.79 6.43,29.41 5.67,30.18 5.25,30.18 4.91,29.83 4.91,29.07 17.03,16.95 v17.03,16.88 | v28.87,19.51 29.01,19.37 v29.01,16.95 29.15,16.95 30.32,15.77 30.32,15.5 30.25,15.43 30.25,15.36 30.32,15.29 30.32,14.04 30.53,13.83 30.53,12.86 | v30.32,23.25 30.32,22.91 27.28,19.86 | v27.28,19.72 27.28,19.86 | 30.53,12.86 v30.53,12.31 | v35.93,23.6 v37.32,23.6 | v38.08,18.96 38.08,16.26 38.15,16.19 38.15,12.93 v38.08,12.86 | 30.53,12.86 32.82,12.86 33.3,12.38 34.82,12.38 35.86,11.34 35.86,10.37 35.72,10.23 v35.72,9.47 | v18.69,18.54 24.71,18.54 26.31,20.14 26.93,20.14 27.14,19.93 27.28,19.86
ALERT  (via drill 0.3)
  Top 0.15: v34.82,13.49 34.82,15.01 34.27,15.56 34.13,15.56 33.44,16.26 33.44,16.67 33.37,16.74 P1.01/2.4B.P$J24 | v35.86,12.1 35.86,11.96 v37.87,9.96 | v12.59,31.77 11.42,30.59 11.35,30.59 10.79,30.04 10.79,27.41 8.99,25.61 v8.99,23.81 | v6.02,5.18 6.22,4.97 6.5,4.97 6.57,4.9 U1.5
  Bottom 0.15: v34.82,13.49 34.82,13.14 v35.86,12.1 | v37.87,9.96 38.36,9.96 42.93,14.53 42.93,18.27 44.31,19.65 44.31,22.97 36.55,30.73 31.71,30.73 30.81,31.63 12.73,31.63 v12.59,31.77 | v8.99,23.81 8.99,8.16 v6.02,5.18
D+  (via drill 0.3)
  Top 0.15: v28.73,22.07 29.01,21.8 29.28,21.8 P1.01/2.4B.P$AD6 | v22.43,19.1 20.35,21.17 20.35,22.56 20.42,22.63 20.42,23.39 16.75,27.06 16.06,27.06 v15.57,27.55 | v12.52,30.59 12.32,30.38 12.32,30.18 12.11,29.97 D4.4
  Bottom 0.15: v28.73,22.07 26.58,22.07 23.6,19.1 v22.43,19.1 | v12.52,30.59 v15.57,27.55
D-  (via drill 0.3)
  Top 0.15: v28.94,23.81 29.77,22.97 29.7,22.91 29.7,22.63 29.42,22.35 29.35,22.35 P1.01/2.4B.P$AD4 | v19.66,19.93 17.44,22.14 17.44,23.87 17.58,24.01 17.58,25.12 15.64,27.06 13.7,27.06 12.8,27.96 12.11,27.96 D4.6
  Bottom 0.15: v28.94,23.81 27.9,23.81 23.67,19.58 20.9,19.58 20.7,19.37 20.21,19.37 v19.66,19.93
DN  (via drill 0.3)
  Top 0.15: v22.29,27.61 22.43,27.75 22.43,28.58 J3.A7 | v23.4,29.55 23.4,28.65 J3.B7 | v18.83,26.85 18,26.85 16.82,28.03 14.6,28.03 D4.1
  Bottom 0.15: v23.4,29.55 22.29,28.45 v22.29,27.61 22.22,27.61 21.46,26.85 v18.83,26.85
DP  (via drill 0.3)
  Top 0.15: 21.94,29.55 21.87,29.48 21.87,29.41 21.94,29.35 21.94,28.65 J3.B6 | 21.94,29.55 22.77,29.55 22.91,29.41 22.91,28.65 J3.A6 | v15.5,29.14 15.36,29.28 15.36,29.35 14.81,29.9 14.6,29.9 D4.3 | v21.11,30.45 21.94,29.62 21.94,29.55
  Bottom 0.15: v15.5,29.14 15.92,29.14 18,31.22 20.35,31.22 v21.11,30.45
EPD_3V3  (via drill 0.3)
  Top 0.3: L5.2 42.86,28.72 42.86,28.24 42.09,27.48 42.09,25.4 C1-EP-DR.1 41.96,25.26 40.99,25.26 40.74,25.02 | 40.74,25.02 40.64,24.91 40.64,24.43 DMG2305UX-7.3 | J2.16 10.66,15.77 10.66,16.19 J2.15 10.79,16.19 10.93,16.19 11,16.12 11.21,16.12 12.11,17.02 14.95,17.02 17.3,19.37 17.3,19.86 EPD_C5.2 17.44,19.93 17.86,19.93 v18.07,20.14 | v40.57,25.19 40.74,25.02
  Bottom 0.3: v40.57,25.19 34.89,25.19 33.3,26.78 25.2,26.78 19.38,20.97 19.31,20.97 18.48,20.14 v18.07,20.14
EPD_BUSY  (via drill 0.3)
  Top 0.15: v28.24,19.44 28.24,19.65 28.94,20.34 29.01,20.27 29.28,20.27 P1.01/2.4B.P$AD12 | v20.56,12.03 v21.67,13.14 | v12.8,18.2 11.83,19.17 11.28,19.17 11.14,19.3 11,19.3 10.93,19.24 J2.9
  Bottom 0.15: v28.24,19.44 28.24,17.64 23.74,13.14 v21.67,13.14 | v20.56,12.03 19.03,12.03 12.87,18.2 v12.8,18.2
EPD_CS  (1 unrouted)
EPD_DC  (via drill 0.3)
  Top 0.15: v26.51,19.58 27.83,20.9 28.94,20.9 29.01,20.83 29.28,20.83 P1.01/2.4B.P$AD10 | v19.93,12.52 v21.67,14.25 | v11.42,18.4 11.28,18.27 10.66,18.27 J2.11
  Bottom 0.15: v26.51,19.58 26.51,19.37 21.67,14.53 v21.67,14.25 | v19.93,12.52 19.38,12.52 13.63,18.27 13.63,19.3 13.29,19.65 12.66,19.65 v11.42,18.4
EPD_RST  (1 unrouted)
GDR  (via drill 0.3)
  Top 0.15: 31.46,32.08 31.36,32.18 31.36,32.39 31.22,32.53 31.08,32.53 Q2.1 | 31.46,32.08 31.57,31.98 31.64,31.98 31.92,31.7 31.92,31.56 31.85,31.49 31.85,31.35 R2_EP_DR.2 | v11.83,23.32 11.28,22.77 10.66,22.77 J2.2 | v30.11,31.15 30.95,31.98 31.36,31.98 31.46,32.08
  Bottom 0.15: v11.83,23.32 14.26,23.32 18.55,27.61 18.9,27.61 22.43,31.15 v30.11,31.15
GND  (31 unrouted)
  Top 0.3: 30.81,10.99 30.88,10.99 30.88,11.13 30.95,11.2 31.15,11.2 31.15,11.27 30.88,11.55 30.81,11.55 30.81,11.41 30.67,11.27 30.6,11.34 30.74,11.48 30.74,11.69 31.22,11.69 J1.3 | 30.81,10.99 30.81,11.13 31.08,11.41 31.15,11.41 31.29,11.27 31.43,11.41 32.26,11.41 J1.5 | IC2.C2 8.58,31.77 IC2.C3 | P1.01/2.4B.P$F23 34.13,17.3 34.13,17.99 34.34,18.2 P1.01/2.4B.P$74 | P1.01/2.4B.P$B7 35.38,21.59 35.45,21.66 35.52,21.66 35.52,21.59 35.45,21.59 35.38,21.66 34.55,21.66 34.41,21.8 P1.01/2.4B.P$74 | P1.01/2.4B.P$75 34.34,21.87 P1.01/2.4B.P$74 | 30.81,10.99 30.74,10.86 30.32,10.44 30.32,9.12 32.61,6.84 34.48,6.84 35.31,6.01 35.38,6.01 35.38,5.87 35.52,5.73 35.72,5.73 35.86,5.59 35.86,5.52 35.59,5.52 C10.1
  pour Top: -3.22,-1.12 48.03,-1.12 48.03,36.93 -3.22,36.73
  pour Bottom: -3.72,-1.42 48.73,-1.42 48.73,37.43 -3.72,36.93
HAPTIC_EN  (via drill 0.3)
  Top 0.15: v28.45,24.29 30.6,24.29 31.29,23.6 31.29,23.32 P1.01/2.4B.P$U1 | v20.56,19.86 20.56,19.72 v15.64,14.8 | v18,8.43 18.41,8.02 18.41,7.81 18.34,7.74 IC4.A1
  Bottom 0.15: v28.45,24.29 27.97,24.29 23.54,19.86 v20.56,19.86 | v15.64,14.8 15.64,10.79 v18,8.43
IMU_INT1  (via drill 0.3)
  Top 0.15: v31.22,24.57 31.36,24.57 32.33,23.6 32.33,23.32 P1.01/2.4B.P$N1 | v31.15,25.88 31.15,26.37 29.98,27.55 29.98,27.82 30.53,28.38 30.81,28.38 32.33,29.9 32.33,30.18 v33.37,31.22 | v38.42,5.94 38.56,5.8 38.91,5.8 38.98,5.87 39.05,5.8 IC3.5
  Bottom 0.15: v31.22,24.57 31.22,25.81 v31.15,25.88 | v33.37,31.22 36.49,31.22 44.59,23.11 44.59,19.51 43.2,18.13 43.2,10.72 v38.42,5.94
IMU_INT2  (1 unrouted)
LX1  (via drill 0.3)
  Top 0.15: IC2.B2 8.58,32.18 IC2.B3 8.65,32.18 8.92,32.18 8.99,32.25 9.06,32.25 v9.13,32.18 | v3.52,32.32 3.52,32.12 2.83,31.42 L1.1
  Bottom 0.15: v9.13,32.18 3.66,32.18 v3.52,32.32
LX2  (via drill 0.3)
  Top 0.15: IC2.D2 8.23,31.35 8.58,31.35 IC2.D3 8.65,31.35 8.92,31.35 8.99,31.28 v9.13,31.42 | v4.28,29.9 4.08,29.69 3.18,29.69 2.83,29.35 L1.2
  Bottom 0.15: v9.13,31.42 5.81,31.42 v4.28,29.9
MOSI  (1 unrouted)
N$1
  Top 0.15: IC1.D1 18.48,14.8 18.55,14.87 18.69,14.87 19.31,15.5 20.56,15.5 20.9,15.84 20.9,17.92 20.56,18.27 19.52,18.27 18.76,17.5 18.76,16.33 R9.2
N$2  (via drill 0.3)
  Top 0.15: v34.13,15.08 32.88,16.33 32.68,16.33 32.61,16.4 32.54,16.4 32.47,16.47 32.4,16.47 32.33,16.53 32.33,16.74 P1.01/2.4B.P$N24 | v39.05,18.96 40.99,20.9 41.54,20.9 v42.37,21.73 | v30.67,28.86 30.6,28.93 29.98,28.93 C9.1
  Bottom 0.15: v34.13,15.08 34.27,15.08 36.97,12.38 38.22,12.38 39.05,13.21 v39.05,18.96 | v42.37,21.73 42.37,24.08 37.59,28.86 v30.67,28.86
N$3  (via drill 0.3)
  Top 0.15: v33.92,16.4 33.78,16.53 33.78,16.74 33.85,16.81 33.58,17.09 33.58,17.23 P1.01/2.4B.P$H23 | v41.13,19.44 42.44,19.44 42.58,19.58 43,19.58 43.06,19.65 LL1.1 43.13,19.72 43.27,19.86 43.76,19.86 v43.83,19.79 | v31.36,30.45 30.67,30.45 CC3.2
  Bottom 0.15: v33.92,16.4 34.89,16.4 37.94,19.44 v41.13,19.44 | v31.36,30.45 36.42,30.45 43.83,23.04 v43.83,19.79
N$4
  Top 0.15: IC2.D1 7.82,31.42 7.61,31.42 7.19,31.01 5.46,31.01 R2.2
N$5
  Top 0.15: IC2.E1 7.82,30.94 7.54,30.66 7.54,29.9 7.75,29.69 7.75,29.55 7.82,29.48 7.82,29.21 R3.2
N$6  (via drill 0.3)
  Top 0.15: v29.77,21.59 29.77,22 P1.01/2.4B.P$AC5 | v23.74,15.84 23.74,18.75 25.41,20.41 25.41,24.5 25.82,24.91 25.82,25.74 26.1,26.02 26.31,26.02 26.44,25.88 26.58,25.88 26.86,26.16 26.86,26.51 27,26.64 C20.2
  Bottom 0.15: v29.77,21.59 24.02,15.84 v23.74,15.84
N$7
  Top 0.15: ANT1.1 42.03,8.85 42.37,9.19 42.37,9.89 42.86,10.37 42.86,11.41 C22.2 42.86,11.48 42.86,13.97 CC4.2 42.93,13.97 42.93,14.53 43.13,14.73 43.13,18.47 LL1.2
N$8  (via drill 0.3)
  Top 0.15: 36.94,15.18 37.94,14.18 38.63,14.18 38.77,14.04 CC1.1 | 36.94,15.18 35.38,16.74 P1.01/2.4B.P$B24 | v37.59,15.98 38.36,15.98 X1.1 | 36.94,15.18 v37.04,15.29
  Bottom 0.15: v37.59,15.98 37.59,15.84 v37.04,15.29
N$9
  Top 0.15: P1.01/2.4B.P$A23 35.79,17.23 35.79,17.16 37.8,15.15 38.84,15.15 39.19,15.5 39.19,16.53 39.81,17.16 X1.3 39.88,17.16 41.89,17.16 CC2.1
N$10  (via drill 0.3)
  Top 0.15: v35.38,18.06 35.24,17.92 35.24,17.57 35.1,17.43 35.1,17.3 34.82,17.02 34.62,17.23 P1.01/2.4B.P$D23 | v38.56,21.24 39.05,21.73 39.05,22 38.91,22.14 38.91,22.84 39.19,23.11 v39.32,23.11 | v27.14,24.98 26.93,25.19 26.51,25.19 26.44,25.26 CC11.1
  Bottom 0.15: v38.56,21.24 v35.38,18.06 | v39.32,23.11 38.42,23.11 37.45,24.08 29.28,24.08 28.38,24.98 v27.14,24.98
N$11  (via drill 0.3)
  Top 0.15: v32.95,24.57 33.16,24.57 34.34,23.39 34.34,23.18 34.13,22.97 34.13,22.84 P1.01/2.4B.P$F2 | v24.92,24.5 24.92,23.74 25.13,23.53 25.13,20.55 23.33,18.75 23.33,16.05 23.26,15.98 v23.26,15.5 | X2.1 25.68,15.91 25.47,15.91 24.99,15.43 v24.99,15.01 24.99,14.94 25.13,14.8 25.13,14.04 C18.1
  Bottom 0.15: v32.95,24.57 32.95,24.71 31.29,26.37 26.79,26.37 v24.92,24.5 | v23.26,15.5 23.47,15.5 23.95,15.01 v24.99,15.01
N$12
  Top 0.15: P1.01/2.4B.P$A22 35.86,17.78 36.14,17.78 36.21,17.85 36.62,17.85 36.97,17.5 37.25,17.5 37.59,17.85 37.59,21.87 36.83,22.63 36.83,25.54 36.42,25.95 36.42,26.78 36.14,27.06 35.93,27.06 35.72,27.27 33.99,27.27 33.92,27.34 C12.1
N$13  (via drill 0.3)
  Top 0.15: v37.11,17.99 36.21,18.89 36.14,18.82 35.86,18.82 P1.01/2.4B.P$A18 | v36.55,13.42 35.31,12.17 v35.31,11.13 | v22.84,17.85 22.43,18.27 22.15,18.27 C13.1
  Bottom 0.15: v37.11,17.99 37.11,15.98 36.55,15.43 v36.55,13.42 | v35.31,11.13 35.31,10.86 32.12,7.67 26.51,7.67 21.18,13 21.18,14.46 22.84,16.12 v22.84,17.85
N$14  (via drill 0.3)
  Top 0.15: v24.64,23.39 24.64,23.53 24.16,24.01 23.81,24.01 LL3.2 | v25.89,23.25 25.89,23.11 25.96,23.04 25.96,22.63 26.03,22.56 LL2.1
  Bottom 0.15: v24.64,23.39 25.75,23.39 v25.89,23.25
N$15  (via drill 0.3)
  Top 0.15: v35.72,22.84 35.72,22.77 35.52,22.56 35.38,22.56 P1.01/2.4B.P$B3 | v28.04,22.7 27.97,22.63 27.41,22.63 27.34,22.56 LL2.2
  Bottom 0.15: v35.72,22.84 34.75,22.84 33.85,23.74 29.49,23.74 28.45,22.7 v28.04,22.7
N$17  (via drill 0.3)
  Top 0.15: C16.1 21.25,23.32 21.46,23.32 22.08,23.94 22.5,23.94 22.57,24.01 LL3.1 | CC10.1 23.81,20.41 23.81,20.83 24.37,21.38 24.37,21.73 24.51,21.87 C15.1 24.44,21.87 24.44,22.42 24.09,22.77 23.47,22.77 22.5,23.74 22.5,23.87 LL3.1 | v38.22,10.44 37.94,10.44 37.39,10.99 37.39,13.56 34.34,16.6 34.34,16.74 P1.01/2.4B.P$E24 | v36.35,22.84 35.79,22.28 35.72,22.28 35.59,22.14 35.45,22.14 35.38,22.07 P1.01/2.4B.P$B5 | v22.43,24.77 22.43,24.71 22.57,24.57 22.57,24.08 LL3.1 | v31.43,27.34 31.85,26.92 31.85,26.85 32.47,26.23 v32.54,26.23
  Bottom 0.15: v38.22,10.44 38.22,10.65 42.09,14.53 42.09,21.24 40.71,22.63 39.81,22.63 | 39.81,22.63 36.55,22.63 v36.35,22.84 | v22.43,24.77 22.64,24.77 25.06,27.2 31.29,27.2 v31.43,27.34 | v32.54,26.23 33.3,26.23 35.17,24.36 38.7,24.36 39.81,23.25 39.81,22.63
N$18  (1 unrouted)
  Top 0.15: C17.1 22.15,10.65 22.15,11.13 23.33,12.31 24.09,12.31 24.51,12.73 24.51,13.14 24.64,13.28 24.51,13.42 24.51,17.23 25.06,17.78 25.06,17.99 25.47,18.4 25.68,18.4 X2.2
N$19  (via drill 0.3)
  Top 0.15: v37.59,4.69 37.52,4.76 37.52,4.83 37.45,4.9 37.45,4.97 37.52,5.04 37.52,5.18 IC3.1 | v40.64,4.69 40.78,4.83 40.78,5.11 40.85,5.18 40.78,5.25 R8.1
  Bottom 0.15: v40.64,4.69 v37.59,4.69
N$20  (via drill 0.3)
  Top 0.15: v30.46,27.68 34.75,23.39 34.75,23.32 P1.01/2.4B.P$C1 | v18.97,21.38 20,20.34 20.7,20.34 21.25,19.79 21.25,16.33 22.84,14.73 23.26,14.73 23.33,14.66 CC5.2
  Bottom 0.15: v30.46,27.68 28.8,27.68 28.59,27.48 24.71,27.48 22.5,25.26 22.29,25.26 18.97,21.94 v18.97,21.38
N$21  (via drill 0.3)
  Top 0.15: v43.76,29.83 44.1,29.48 44.1,29.14 C2-EP-DR.1 | v41.26,32.25 40.99,32.53 40.99,32.74 40.71,33.02 D2.2 | v19.73,13.76 19.45,13.49 19.45,12.38 19.66,12.17 19.66,11.41 D1.1 | v18.2,26.23 16.89,27.55 v16.2,27.55
  Bottom 0.15: v43.76,29.83 41.33,32.25 v41.26,32.25 41.19,32.25 40.85,31.91 17.93,31.91 17.58,32.25 12.46,32.25 12.11,31.91 12.11,31.63 v16.2,27.55 | v19.73,13.76 19.73,15.63 17.3,18.06 17.3,25.33 v18.2,26.23
N$22
  Top 0.15: R1_EP_DR.2 35.59,34.54 35.31,34.54 35.17,34.4 32.26,34.4 31.78,33.92 31.08,33.92 Q2.2
N$23
  Top 0.15: SJ1.2 36.21,30.45 36.07,30.59 36.07,32.18 R_TYPE_SEL.2 36,32.18 35.93,32.25 36,32.32 36,32.39 35.93,32.46 35.93,32.53 36,32.6 36,32.67 35.65,33.02 35.65,33.99 R1_EP_DR.1
N$24
  Top 0.15: Q2.3 29.01,33.29 33.44,33.29 33.58,33.43 D3.2 33.37,33.22 33.37,31.84 34.96,30.25 34.96,28.1 35.24,27.82 37.94,27.82 38.29,28.17 38.29,28.72 L5.1 38.36,28.79 38.36,29.62 39.88,31.15 40.09,31.15 40.71,31.77 43.55,31.77 44.93,30.38 44.93,28.03 44.73,27.82 44.17,27.82 C2-EP-DR.2
N$25
  Top 0.15: J2.4 11.21,21.73 12.73,23.25 12.73,23.53 12.94,23.74 13.36,23.74 13.43,23.81 EPD_C2.2
N$26
  Top 0.15: J2.5 11.28,21.24 11.49,21.45 11.49,21.59 12.32,22.42 13.7,22.42 13.84,22.56 EPD_C1.2
N$27
  Top 0.15: R15.2 21.6,27.34 21.6,27.41 21.32,27.68 21.25,27.68 20.84,28.1 20.84,28.51 20.9,28.58 J3.B5
N$28  (via drill 0.3)
  Top 0.15: v9.89,14.39 10.03,14.25 10.59,14.25 J2.19 | v11.83,20.34 12.04,20.55 12.04,20.9 12.18,21.04 EPD_C7.2
  Bottom 0.15: v9.89,14.39 9.89,18.4 v11.83,20.34
N$29
  Top 0.15: C5.2 11.69,8.5 12.04,8.5 16.13,4.42 16.54,4.42 R11.1
N$30  (via drill 0.3)
  Top 0.15: v11.42,11.83 11.28,11.69 11.07,11.69 11,11.76 10.66,11.76 J2.24 | v12.18,13 12.59,13.42 12.8,13.42 12.87,13.35 EPD_C12.2
  Bottom 0.15: v11.42,11.83 11.42,12.24 v12.18,13
N$31  (via drill 0.3)
  Top 0.15: v11.42,14.8 11.28,14.66 11.21,14.73 J2.18 | v13.15,19.17 14.74,20.76 14.74,21.1 14.88,21.24 EPD_C6.2
  Bottom 0.15: v11.42,14.8 11.42,17.43 v13.15,19.17
N$32
  Top 0.15: J2.20 10.66,13.76 11.49,13.76 12.32,14.6 12.73,14.6 12.8,14.66 EPD_C8.2
N$33
  Top 0.15: R12.1 32.75,5.59 32.75,5.32 32.68,5.25 32.82,5.11 34.2,5.11 34.68,5.59 34.96,5.59 C10.2
N$34
  Top 0.15: EPD_C10.2 12.8,9.54 12.39,9.54 11.9,10.02 11.9,12.1 11.28,12.73 J2.22
N$35  (via drill 0.3)
  Top 0.15: v22.29,5.52 22.29,5.59 22.22,5.66 21.87,5.66 R13.1 | v26.1,4.76 25.96,4.9 25.68,4.9 C11.2
  Bottom 0.15: v22.29,5.52 25.34,5.52 v26.1,4.76
N$36  (via drill 0.3)
  Top 0.15: v23.12,26.92 23.26,26.78 23.6,26.78 R14.1 | v24.02,29.55 23.88,29.41 23.88,28.65 J3.A5
  Bottom 0.15: v23.12,26.92 23.12,28.65 v24.02,29.55
N$37
  Top 0.15: IC4.A2 18.34,7.19 18.62,7.19 18.76,7.32 18.76,8.78 18.34,9.19 18.13,9.19 18.07,9.26 18,9.19 C3.2
OUT+  (via drill 0.3)
  Top 0.15: v18.69,6.35 18.41,6.63 18.34,6.63 IC4.A3 | v18.83,4.97 19.8,4 TP_OP.TP
  Bottom 0.15: v18.69,6.35 18.69,5.11 v18.83,4.97
OUT-  (via drill 0.3)
  Top 0.15: v17.03,6.22 16.89,6.35 16.89,6.42 17.1,6.63 17.23,6.63 IC4.C3 | v20,7.6 20.14,7.74 20.77,7.74 21.18,8.16 TP_ON.TP
  Bottom 0.15: v17.03,6.22 17.93,6.22 19.31,7.6 v20,7.6
P0.13  (via drill 0.3)
  Top 0.15: v20.9,10.37 20.9,10.58 22.91,12.59 23.95,12.59 24.23,12.86 24.23,18.82 26.79,21.38 28.94,21.38 29.01,21.31 29.28,21.31 P1.01/2.4B.P$AD8 | v12.73,3.24 11.35,3.24 SW1.2
  Bottom 0.15: v20.9,10.37 20.56,10.37 13.7,3.52 13.01,3.52 v12.73,3.24
P0.14  (1 unrouted)
P1.01  (via drill 0.3)
  Top 0.15: v30.05,17.23 30.11,17.23 30.18,17.3 30.53,17.3 P1.01/2.4B.P$Y23 | v39.39,21.45 39.6,21.66 39.6,22.14 39.67,22.21 DMG2305UX-7.1 39.67,22 40.29,22 R_PWR_EPD.1
  Bottom 0.15: v30.05,17.23 35.17,17.23 v39.39,21.45
P1.02  (via drill 0.3)
  Top 0.15: v30.81,16.33 30.74,16.4 30.81,16.47 30.81,16.74 P1.01/2.4B.P$W24 | v37.11,9.33 v36.35,10.09 | v34.34,3.24 33.37,3.24 32.61,4 SW3.2
  Bottom 0.15: v30.81,16.33 31.15,16.33 31.36,16.53 32.61,16.53 33.65,15.5 33.65,14.94 34.62,13.97 34.96,13.97 36.35,12.59 v36.35,10.09 | v37.11,9.33 37.11,6.15 37.39,5.87 37.39,5.59 36.83,5.04 36.14,5.04 v34.34,3.24
PMIC_INT  (via drill 0.3)
  Top 0.15: v18.62,11.83 18.83,12.03 18.83,13.28 18.69,13.42 18.55,13.42 18.48,13.49 IC1.A1 | v32.19,5.04 v31.57,4.42 | v35.45,4.97 35.52,4.9 35.86,4.9 36,5.04 v36.49,4.55 | v44.93,19.24 44.31,19.86 44.31,19.93 43.83,20.41 v41.13,20.41 | v31.08,22.84 31.5,22.84 P1.01/2.4B.P$T2
  Bottom 0.15: v18.62,11.83 18.83,11.83 19.8,10.86 21.94,10.86 28.38,4.42 v31.57,4.42 | v32.19,5.04 35.38,5.04 v35.45,4.97 | v36.49,4.55 36.83,4.55 37.73,5.45 38.56,5.45 44.93,11.83 v44.93,19.24 | v41.13,20.41 39.19,22.35 34.82,22.35 34.34,22.84 v31.08,22.84
PREVGH  (via drill 0.3)
  Top 0.15: 11.35,13.21 10.66,13.21 J2.21 | 11.35,13.21 12.32,12.24 12.8,12.24 12.94,12.1 EPD_C9.2 | v32.82,29.97 33.58,29.97 D3.1 | v12.87,17.57 v15.23,19.93 | v11.49,13.28 11.42,13.21 11.35,13.21
  Bottom 0.15: v32.82,29.97 28.18,29.97 27.41,30.73 22.43,30.73 19.03,27.34 18.69,27.34 15.23,23.87 v15.23,19.93 | v12.87,17.57 12.87,14.66 v11.49,13.28
PREVGL
  Top 0.15: 10.17,9.33 10.17,11.2 9.89,11.48 9.89,12.1 10.03,12.24 10.59,12.24 J2.23 | 10.17,9.33 10.17,8.64 EPD_C11.2 | 10.17,9.33 11.62,9.33 12.32,8.64 14.6,8.64 16.13,10.16 16.13,11.34 D1.2
RESET  (1 unrouted)
  Top 0.15: J1.6 32.61,12.93 32.75,12.79 32.75,12.73 33.16,12.31 34.2,12.31 34.82,11.69 34.82,10.79 34.68,10.65 34.75,10.58 34.75,10.51 34.34,10.09 34.34,9.61 TP_RESET.TP
SCK  (via drill 0.3)
  Top 0.15: v36.28,20.41 36.14,20.27 35.86,20.27 P1.01/2.4B.P$A12 | v38.56,21.87 38.56,22.97 39.88,24.29 39.88,25.54 v40.09,25.74 | v27.97,29.55 27.97,30.18 27.21,30.94 20.42,30.94 v20.21,30.73 | v10.79,24.36 9.82,23.39 9.82,17.5 10.1,17.23 10.59,17.23 J2.13
  Bottom 0.15: v36.28,20.41 37.11,20.41 v38.56,21.87 | v40.09,25.74 34.89,25.74 32.26,28.38 29.15,28.38 v27.97,29.55 | v20.21,30.73 17.93,30.73 16.68,29.48 16.68,27.41 13.63,24.36 v10.79,24.36
SCL/1.4C  (via drill 0.3)
  Top 0.15: v17.03,8.09 17.16,7.95 17.16,7.81 17.23,7.74 IC4.C1 | v7.61,4.07 7.47,4.21 7.47,4.42 7.54,4.48 7.54,4.83 U1.7
  Bottom 0.15: v17.03,8.09 11.62,8.09 v7.61,4.07
SCL/2.4C  (via drill 0.3)  (1 unrouted)
  Top 0.15: v19.03,13.9 18.9,14.04 18.83,14.04 18.76,13.97 18.48,13.97 IC1.B1 | 5.29,29.45 5.25,29.41 5.25,29.28 5.32,29.21 5.32,29.07 R4.1 | 5.29,29.45 v5.46,29.62 5.46,29.97 4.77,30.66 4.84,30.73 4.84,31.01 R2.1 | v36.9,5.73 37.45,5.73 IC3.12 | 5.29,29.45 5.18,29.55 5.05,29.55 4.84,29.35 4.84,29.14 4.08,28.38 3.11,28.38 2.14,27.41 1.51,27.41 TP_SCL.TP
  Bottom 0.15: v5.46,29.62 5.46,29.07 19.45,15.08 19.45,14.32 v19.03,13.9 19.03,13.83 19.59,13.28 20.35,13.28 26.24,7.39 29.63,7.39 31.29,5.73 v36.9,5.73
SDA/1.4C  (1 unrouted)
SDA/2.4C  (via drill 0.3)
  Top 0.15: R3.1 7.19,29.14 7.19,28.65 TP_SDA.TP 5.32,26.71 5.88,26.16 5.95,26.16 6.57,25.54 6.85,25.54 7.05,25.33 7.05,25.05 v7.12,24.91 7.05,24.98 6.71,24.98 6.64,25.05 6.57,24.98 R5.1 | IC1.C1 18.48,14.32 18.76,14.32 v18.97,14.53 19.73,14.53 v20.21,15.01 | v28.45,27.96 32.82,23.6 32.82,23.32 P1.01/2.4B.P$L1 | v37.59,4.07 38.08,4.55 38.08,4.83 38.01,4.9 38.01,5.18 IC3.2
  Bottom 0.15: v7.12,24.91 8.51,24.91 13.91,19.51 13.91,19.37 18.76,14.53 v18.97,14.53 18.76,14.46 18.55,14.25 18.55,13.76 19.31,13 20.21,13 26.1,7.12 29.49,7.12 33.85,2.75 34.48,2.75 34.82,3.1 34.82,3.24 35.65,4.07 v37.59,4.07 | v28.45,27.96 27.76,27.96 27.55,27.75 24.57,27.75 22.36,25.54 22.15,25.54 17.58,20.97 17.58,18.2 20.21,15.56 v20.21,15.01
SWDCLK  (via drill 0.3)
  Top 0.15: P1.01/2.4B.P$AA24 30.32,16.74 30.32,16.47 30.25,16.4 30.25,15.5 30.32,15.43 30.32,15.29 30.25,15.22 30.25,14.53 30.32,14.46 30.32,13.97 31.29,13 J1.4 31.29,12.93 31.78,12.45 v31.78,12.31 | v30.53,8.16 30.6,8.09 30.6,6.77 TP_SWDCLK.TP
  Bottom 0.15: v30.53,8.16 30.53,8.85 30.32,9.06 30.32,9.33 30.25,9.4 30.25,10.16 30.32,10.23 30.32,10.86 v31.78,12.31
SWDIO  (via drill 0.3)
  Top 0.15: v28.59,16.53 28.8,16.53 28.87,16.47 29.35,16.47 29.56,16.67 29.7,16.67 29.77,16.74 P1.01/2.4B.P$AC24 | v29.28,13.21 29.42,13.21 29.63,13 29.98,13 J1.2 | v27.55,8.16 28.18,7.53 28.18,6.98 TP_SWDIO.TP
  Bottom 0.15: v28.59,16.53 28.04,16.53 27.07,15.56 27.07,14.18 28.04,13.21 | 28.04,13.21 28.59,13.21 28.66,13.28 29.01,13.28 29.08,13.21 v29.28,13.21 | v27.55,8.16 27.55,8.64 27.07,9.12 27.07,12.17 28.04,13.14 28.04,13.21
SWO
  Top 0.15: P1.01/2.4B.P$AD22 29.28,17.78 29.01,17.78 28.94,17.85 27.07,15.98 27.07,14.53 27.14,14.46 27.14,10.23 25.06,8.16 25.06,8.09 24.64,7.67 24.64,7.05 TP_SWO.TP
VBAT/1.2A
  Top 0.3: U1.3 7.05,6.84 7.47,6.84 U1.2 7.54,6.98 7.54,7.39 7.19,7.74 4.63,7.74 3.7,6.8 | 3.7,6.8 2.97,7.53 2.97,8.29 TP_VBAT.TP | 3.7,6.8 4.56,5.94 4.98,6.35 C2.2
VBAT/2.5C  (1 unrouted)
VBUS/1.5D
  Top 0.3: C42.2 15.99,33.22 15.99,33.08 15.92,33.02 16.06,32.88 16.06,32.74 16.33,32.46 16.54,32.46 C43.1 16.47,32.32 16.47,31.84 15.33,30.7 | 15.33,30.7 15.3,30.66 13.77,30.66 13.08,29.97 13.08,29.21 12.8,28.93 12.11,28.93 D4.5 | 20.07,27.48 20.28,27.68 20.28,28.58 J3.A9_B4 | 20.07,27.48 17.93,27.48 15.57,29.83 15.57,30.45 15.33,30.7 | J3.A4_B9 24.99,28.58 24.99,27.68 24.85,27.55 22.98,27.55 22.01,26.58 20.77,26.58 20,27.34 20.07,27.48
VBUS/2.6D  (via drill 0.3)
  Top 0.3: 16.92,12.41 16.68,12.17 15.36,12.17 14.6,11.41 13.15,11.41 12.94,11.2 12.94,10.79 C38.1 | 16.92,12.41 18,13.49 IC1.A2 | v27.14,24.08 27.97,23.25 28.94,23.25 29.28,22.91 29.28,22.84 P1.01/2.4B.P$AD2 | v21.39,15.29 22.22,14.46 22.22,12.45 20.28,10.51 | 20.28,10.51 18.83,10.51 16.92,12.41 | C21.1 26.31,12.73 26.31,12.1 23.88,9.68 20.84,9.68 20.35,10.16 20.35,10.37 20.28,10.51
  Bottom 0.3: v27.14,24.08 25.27,24.08 25.13,23.94 22.98,23.94 19.52,20.48 19.45,20.48 18.13,19.17 18.13,18.33 21.18,15.29 v21.39,15.29
VREG  (via drill 0.3)
  Top 0.15: IC2.A3 8.58,32.53 8.51,32.53 8.44,32.46 8.37,32.53 8.23,32.53 IC2.A2 8.16,32.53 7.89,32.53 IC2.A1 7.82,32.6 7.54,32.88 | 7.54,32.88 6.15,32.88 5.95,32.67 5.81,32.67 5.74,32.74 5.6,32.74 5.25,33.08 4.7,33.08 TP_VREG.TP | 17.44,14.32 17.44,14.94 18.13,15.63 19.03,15.63 19.52,16.12 19.93,16.12 20,16.19 C39.1 | 17.44,14.32 17.44,14.18 17.65,13.97 18,13.97 IC1.B2 | 12.66,25.95 13.91,25.95 16.06,23.81 16.06,23.67 16.2,23.53 16.54,23.53 16.68,23.39 C24.2 16.75,23.32 16.89,23.18 16.89,22.28 18.55,20.62 18.55,19.93 15.16,16.53 15.16,14.66 15.5,14.32 17.44,14.32 | 12.66,25.95 C23.2 | v7.54,32.95 7.54,32.88 | v12.66,26.09 12.66,25.95
  Bottom 0.15: v7.54,32.95 8.99,32.95 12.66,29.28 v12.66,26.09
(copper drawn outside any net)
  shapes: Top area x2